# Altium PCB Bop_it.PcbDoc
Units mil, origin at the board's own origin, x right, y up, seen from the top; angles counter-clockwise.
Board outline 6000 x 4000 mil, 4 copper layers (Top Layer, Top Mid Layer, Bottom Mid Layer, Bottom Layer), stack 23.756 mil thick; 32 components, 48 nets, 167 pads, 0 vias.
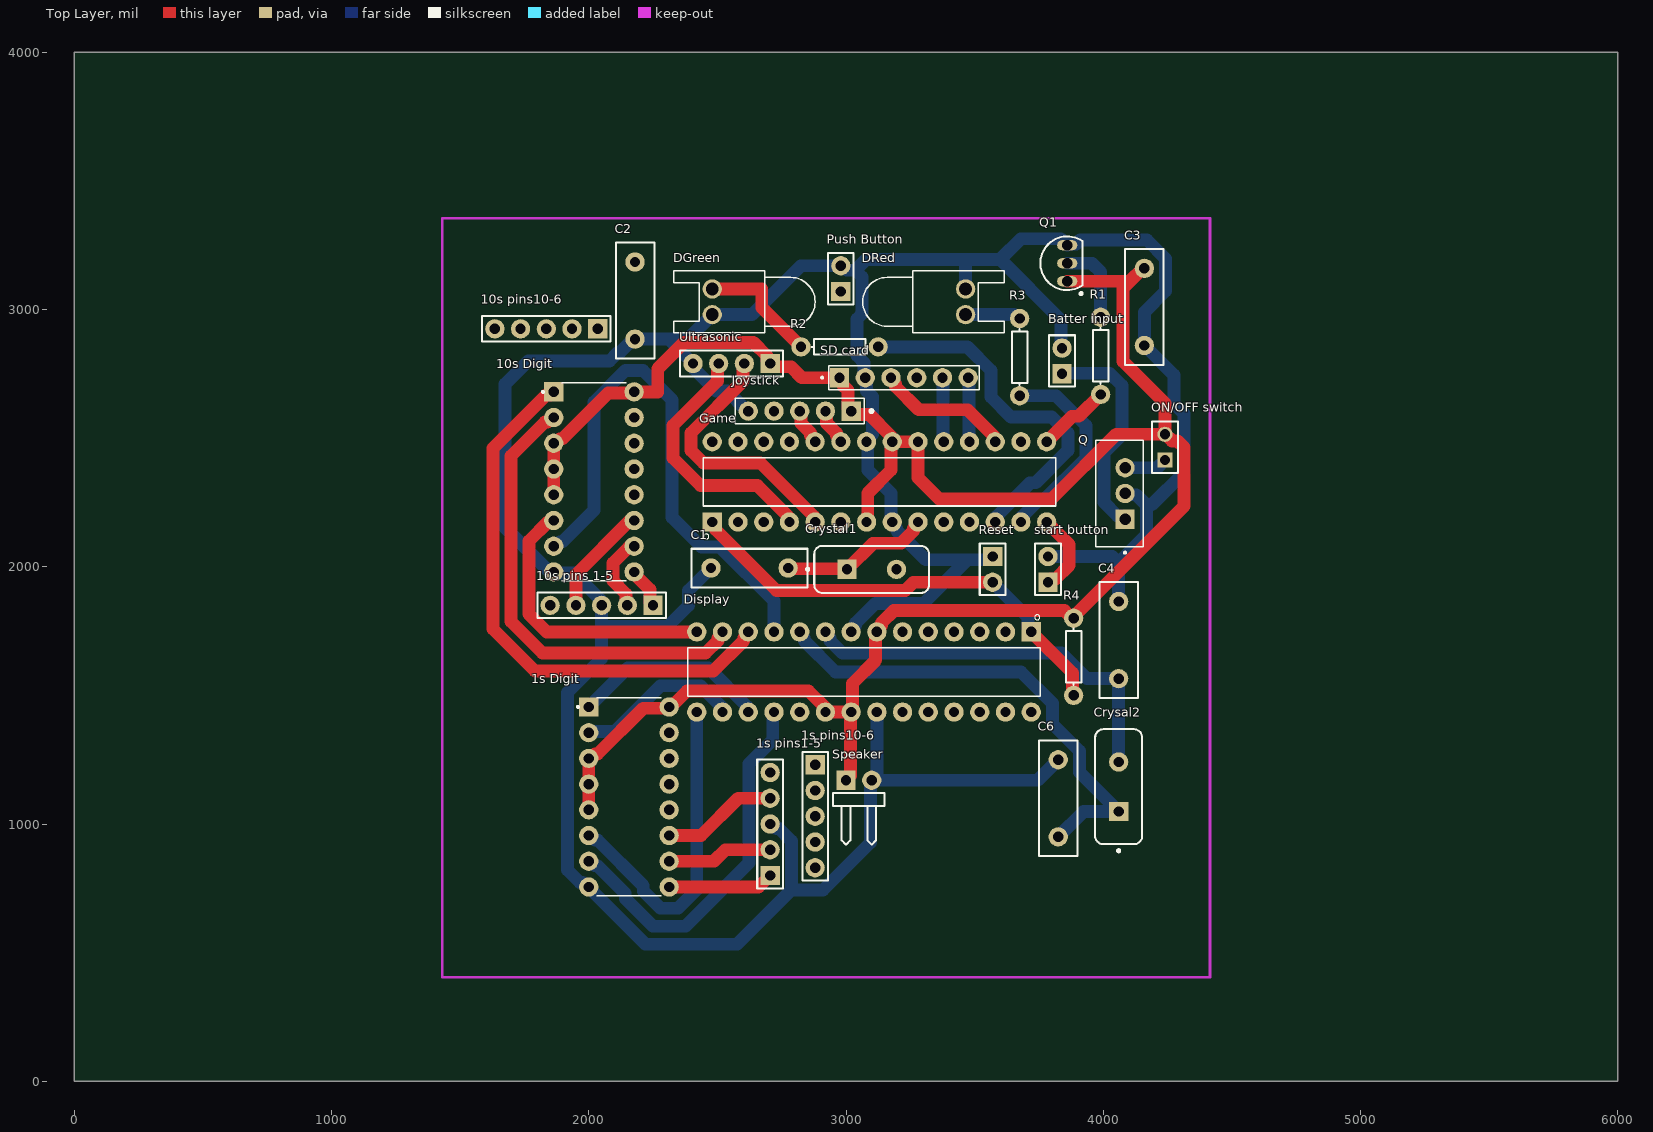
[diagram p0: Top Layer view]
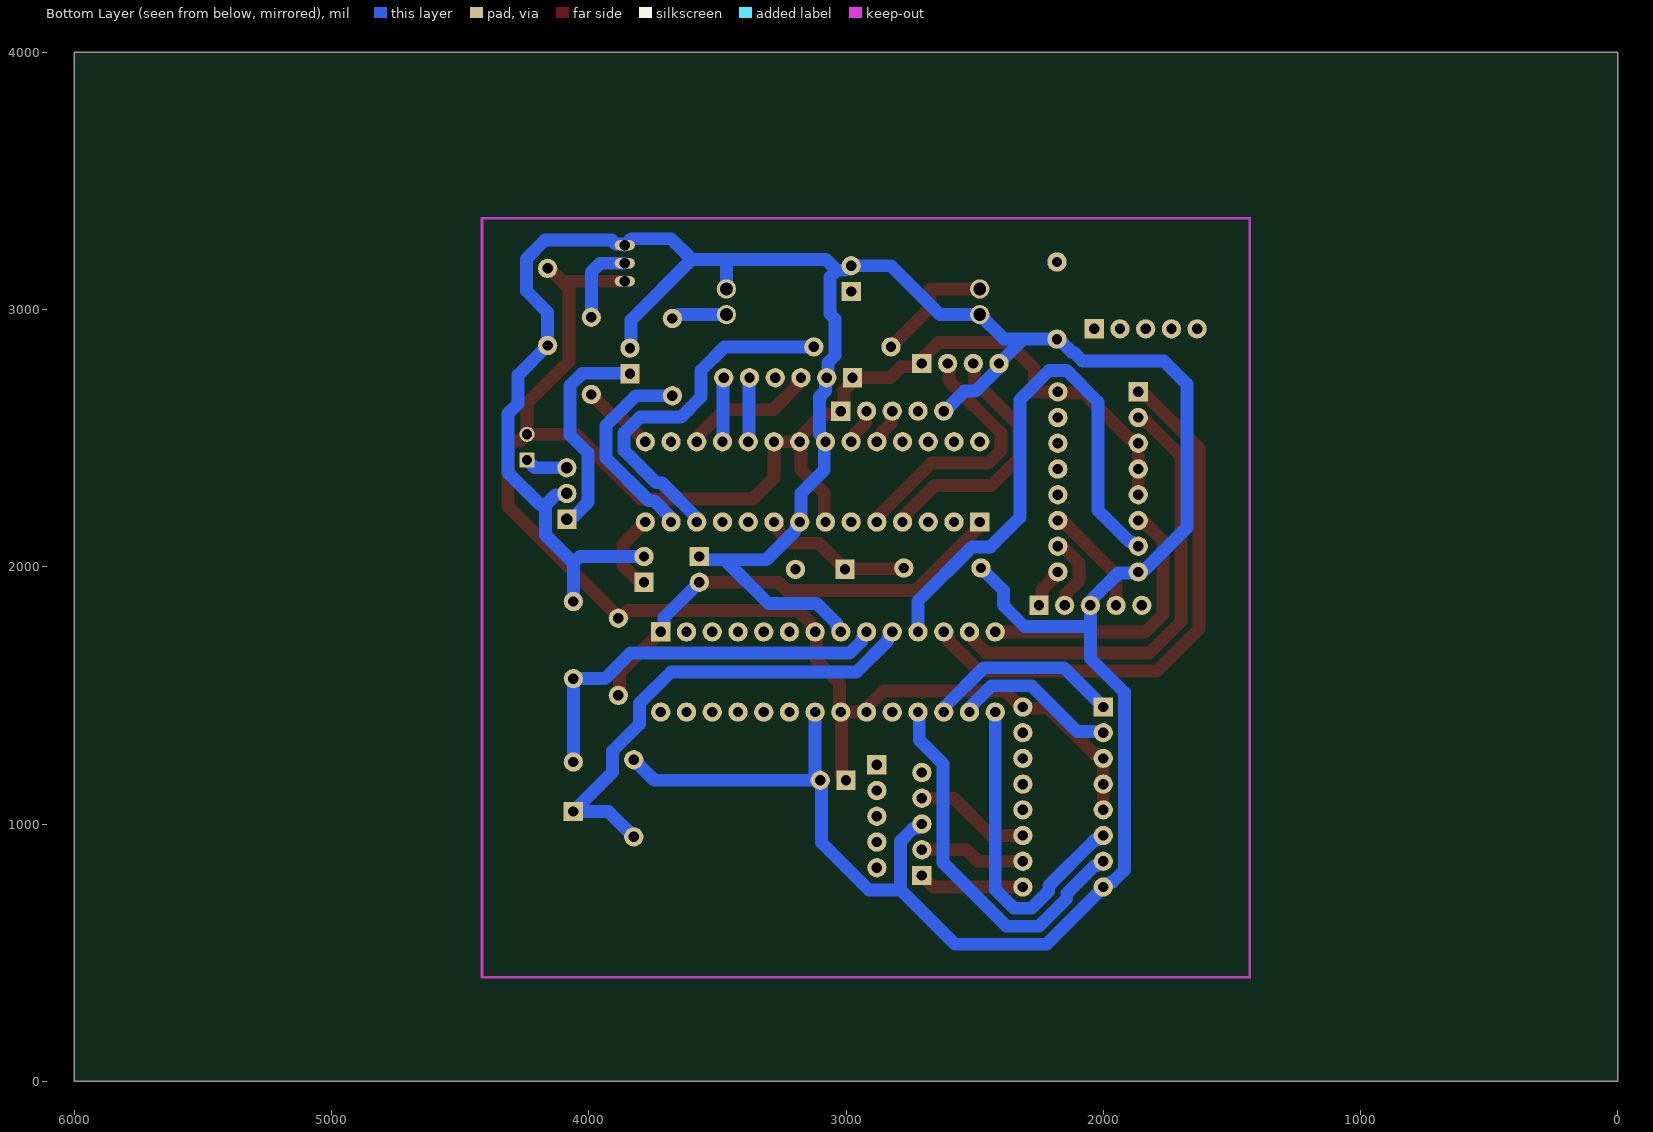
[diagram p1: Bottom Layer view, seen from below]
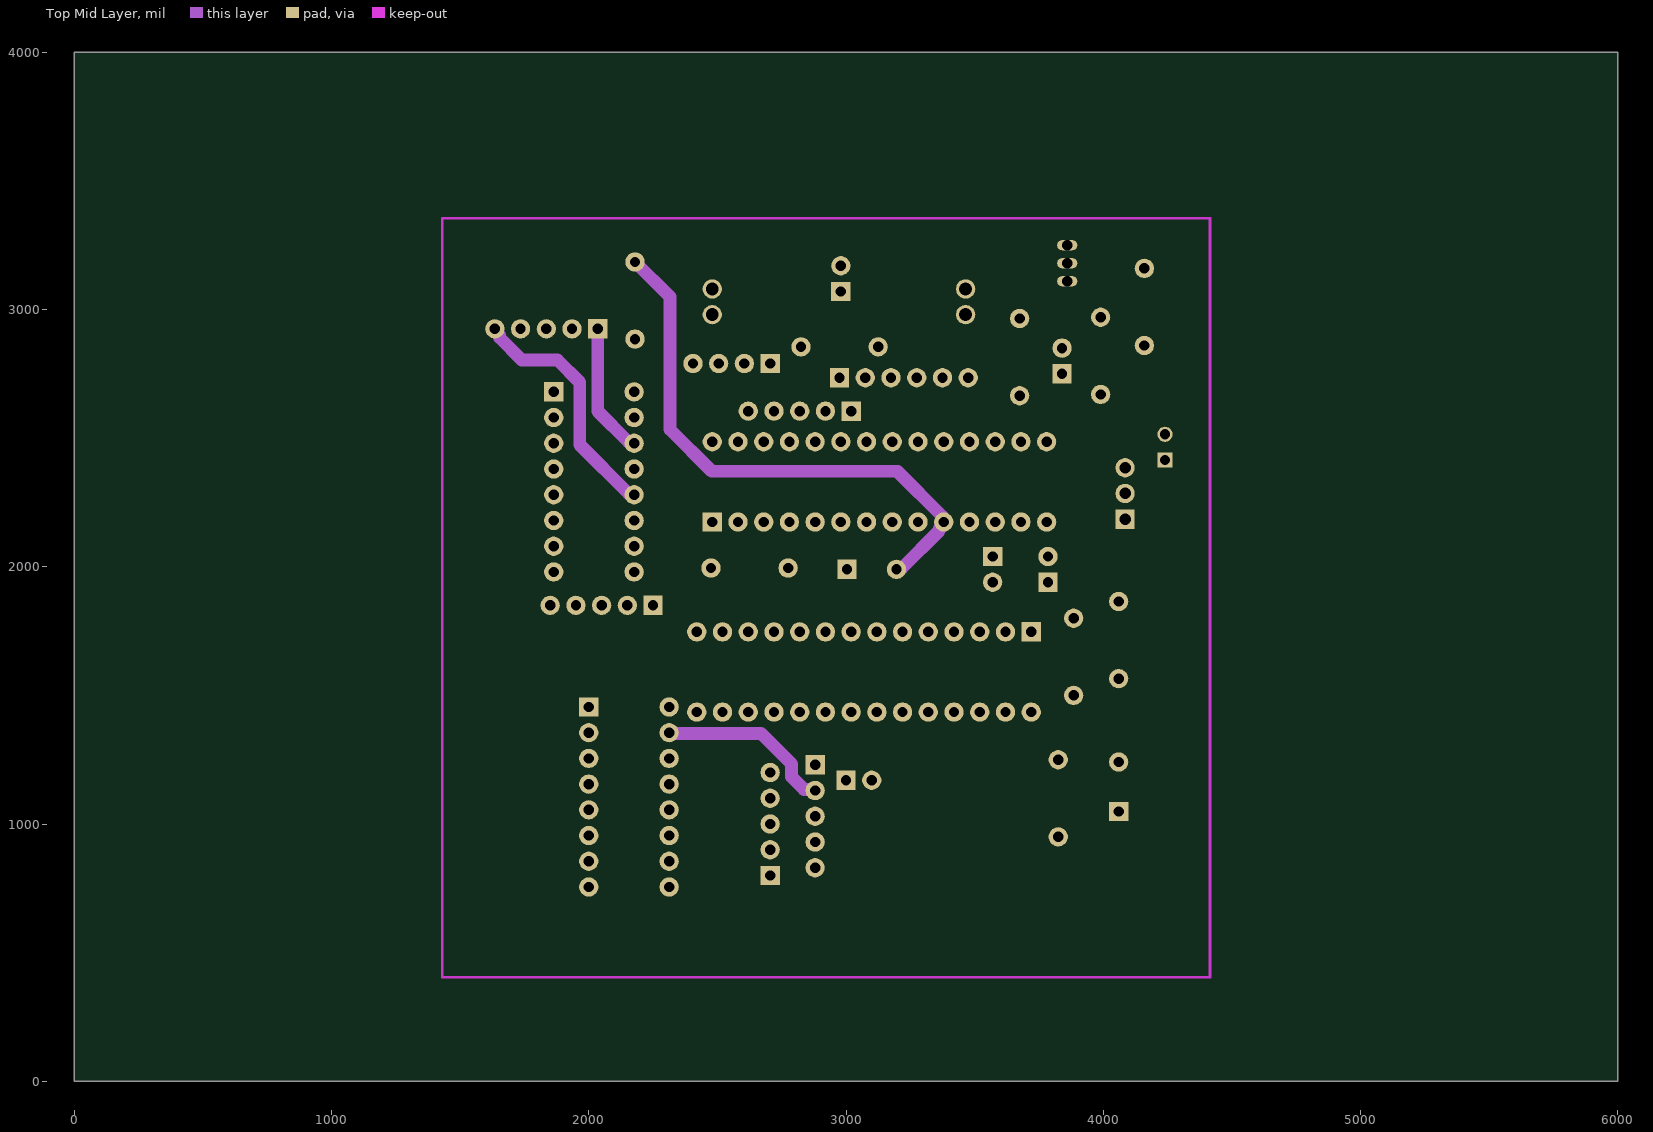
[diagram p2: Top Mid Layer]
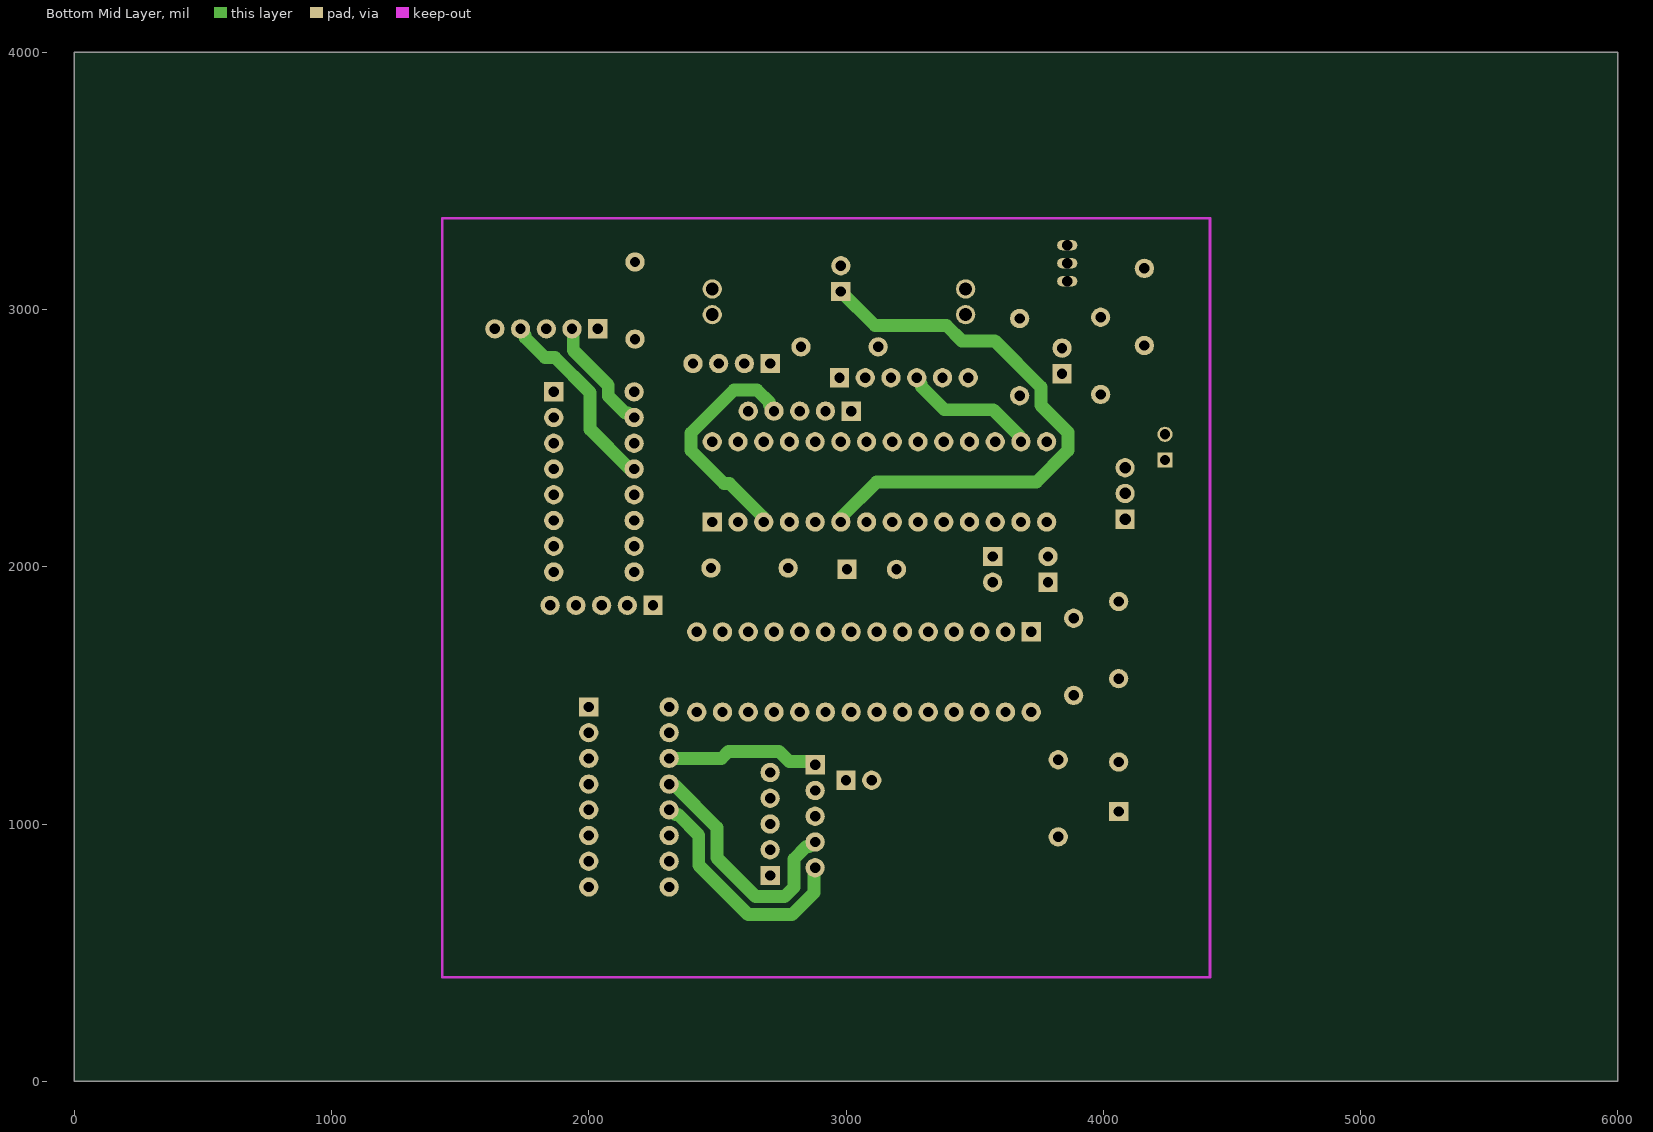
[diagram p3: Bottom Mid Layer]

## Layer stack, top to bottom
Top Solder: solder mask 0.4, Solder Resist, Dk 3.5
Top Layer: signal copper 1.4
Dielectric 2: prepreg 2.8, PP-006, Dk 4.1
Top Mid Layer: signal copper 1.378
Dielectric 1: dielectric 12.6, FR-4, Dk 4.8
Bottom Mid Layer: signal copper 1.378
Dielectric 3: prepreg 2.8, PP-006, Dk 4.1
Bottom Layer: signal copper 1.4
Bottom Solder: solder mask 0.4, Solder Resist, Dk 3.5

## Board outline
0,0 6000,0 6000,4000 0,4000

## Design rules (kind name [scope] priority, off if disabled: settings)
BoardOutlineClearance [All] p1: gap=12 ignorepadtopadclearanceinfootprint=FALSE
Clearance [All] p1: gap=20 ignorepadtopadclearanceinfootprint=TRUE except(24: Arc-Via Track-Via SMDPad-Via THPad-Via Via-Via Via-Fill Via-Poly Via-Region Via-Text Via-Hole)
DiffPairsRouting [All] p1: maxlimit=10 minlimit=7 mostfreqgap=10 toplayer_minwidth=6 toplayer_maxwidth=15 toplayer_prefwidth=8 midlayer1_mingap=10 midlayer1_minwidth=15 midlayer1_maxwidth=15 midlayer1_prefwidth=15 midlayer2_mingap=10 midlayer2_minwidth=15 midlayer2_maxwidth=15 midlayer2_prefwidth=15 bottomlayer_minwidth=6 bottomlayer_maxwidth=15 bottomlayer_prefwidth=8 maxuncoupledlength=500
HoleSize [All] p1: absolutevalues=TRUE maxlimit=1000 minlimit=39.37 maxpercent=80.000 minpercent=20.000
HoleToHoleClearance [All] p1: gap=17 allowstackedmicrovias=TRUE
PolygonConnect [All] p1: connectstyle=Relief reliefconductorwidth=10 reliefentries=4 polygonreliefangle="90 Angle" airgapwidth=10
RoutingVias [All] p1: holewidth=30 width=35 viastyle="Through Hole" minholewidth=10 minwidth=11 maxholewidth=255 maxwidth=250
SilkToSilkClearance [All] p1: silktosilkclearance=0
SolderMaskExpansion SolderMaskExpansion_1 [All] p1: expansion=4 istentingtop=FALSE
Width [All] p1: maxlimit=10000 minlimit=30 preferedwidth=50 minimp=50.000000 maximp=50.000000 favimp=50.000000
26 further rules are at their usual default settings.

## Components (designator, comment, footprint, x,y, rotation, side; value= is the part's Value field where it differs from the comment)
"1s Digit" "SN74LS247N" DIP794W45P254L1969H508Q16 2156.3,1105 r0 top
"1s pins1-5" "Header 5" HDR1X5 2705,800 r90 top
"1s pins10-6" "Header 5" HDR1X5 2880,1230 r270 top
"10s Digit" "SN74LS247N" DIP794W45P254L1969H508Q16 2020,2330 r0 top
"10s pins10-6" "Header 5" HDR1X5 2035,2925 r180 top
"10s pins 1-5" "Header 5" HDR1X5 2250,1850 r180 top
"Batter input" "Header 2" HDR1X2#1 3840,2750 r90 top
C1 "C1" RAD-0.3 2625,1995 r0 top value=22pF
C2 "C2" RAD-0.3 2180,3035 r90 top value=22pF
C3 "Cap" RAD-0.3 4160,3010 r90 top value=10uF
C4 "C1" RAD-0.3 4060,1715 r90 top value=22pF
C6 "C5" RAD-0.3 3825,1100 r90 top value=22pF
Crysal2 "FOXSLF/160-20" FOX-FOXSLF160-20 4060,1145 r90 top
Crystal1 "FOXSLF/160-20" FOX-FOXSLF160-20 3100,1990 r0 top
DGreen "LED0" LED-0 2480,3030 r90 top
Display "ATMEGA328P-PU" DIP794W46P254L2967H457Q28B 3070,1590.91 r270 top
DRed "LED0" LED-0 3465,3030 r270 top
Game "ATMEGA328P-PU" DIP794W46P254L2967H457Q28B 3130,2330 r90 top
Joystick "Joystick" TE_826629-5 3020,2605 r180 top
"ON/OFF switch" "Header 2" HDR1X2#2 4240,2415 r90 top
"Push Button" "Header 2" HDR1X2#1 2980,3070 r90 top
Q "LM7805CT/NOPB" TO254P1054X470X2600-3 4085,2185 r90 top
Q1 "NPN" TO-226-AA 3860,3180 r0 top
R1 "Res1" AXIAL-0.3 3990,2820 r90 top value=n/a
R2 "Res1" AXIAL-0.3 2975,2855 r0 top value=1.2k
R3 "Res1" AXIAL-0.3 3675,2815 r270 top value=1.2k
R4 "Res1" AXIAL-0.3 3885,1650 r90 top value=10K
Reset "Header 2" HDR1X2#1 3570,2040 r270 top
"SD card" "SD Card Reader" TE_5-146285-6 2975,2735 r0 top
Speaker "Header 2H" HDR1X2H 3000,1170 r0 top
"start button" "Header 2" HDR1X2#1 3785,1940 r90 top
Ultrasonic "Ultrasonic sensor" HDR1X4 2705,2790 r180 top

## Footprints (in the part's own frame and the unit in brackets; to place one, negate y for a bottom-side part, rotate by r counter-clockwise, add the part's x,y. Pads: shape width x height; smd on the part's side, far side on the other; paste and mask are expansions set on the pad)
AXIAL-0.3 [mil] "Axial Device, Thru-Hole; 2 Leads; 0.3 in Pin Spacing"
  round 75 hole 40: 1(-150,0) 2(150,0)
  silkscreen extent -109,-30 109,30
DIP794W45P254L1969H508Q16 [mil]
  rect 75x75 hole 40: 1(-156.3,350)
  round 75 hole 40: 2(-156.3,250) 3(-156.3,150) 4(-156.3,50) 5(-156.3,-50) 6(-156.3,-150) 7(-156.3,-250) 8(-156.3,-350) 9(156.3,-350) 10(156.3,-250) 11(156.3,-150) 12(156.3,-50) 13(156.3,50) 14(156.3,150) 15(156.3,250) 16(156.3,350)
  silkscreen extent -202,-385 125,385, body extent -380,-215 380,215, height 200
DIP794W46P254L2967H457Q28B [mil]
  rect 75x75 hole 40: 1(-155.91,650)
  round 75 hole 40: 2(-155.91,550) 3(-155.91,450) 4(-155.91,350) 5(-155.91,250) 6(-155.91,150) 7(-155.91,50) 8(-155.91,-50) 9(-155.91,-150) 10(-155.91,-250) 11(-155.91,-350) 12(-155.91,-450) 13(-155.91,-550) 14(-155.91,-650) 15(155.91,-650) 16(155.91,-550) 17(155.91,-450) 18(155.91,-350) 19(155.91,-250) 20(155.91,-150) 21(155.91,-50) 22(155.91,50) 23(155.91,150) 24(155.91,250) 25(155.91,350) 26(155.91,450) 27(155.91,550) 28(155.91,650)
  silkscreen extent -223,-685 94,685
FOX-FOXSLF160-20 [mil] "THD, 2-Leads, Body 11.35x4.65mm"
  rect 75x75 hole 40: 1(-96.06,0)
  round 75 hole 40: 2(96.06,0)
  silkscreen extent -254,-92 223,92, body extent -223,-92 223,92, height 142
HDR1X2#1 [mil] "Connector; Header; 2 Position"
  rect 75x75 hole 40: 1(0,0)
  round 75 hole 40: 2(100,0)
  silkscreen extent -50,-50 150,50
HDR1X2#2 [mil] "Connector; Header; 2 Position"
  rect 59.06x59.06 hole 40: 1(0,0)
  round 59.06 hole 40: 2(100,0)
  silkscreen extent -50,-50 150,50
HDR1X2H [mil] "Connector; Header; 2 Position; Right Angle"
  rect 75x75 hole 40: 1(0,0)
  round 75 hole 40: 2(100,0)
  silkscreen extent -50,-250 150,-50
HDR1X4 [mil] "Connector; Header; 4 Position"
  rect 75x75 hole 40: 1(0,0)
  round 75 hole 40: 2(100,0) 3(200,0) 4(300,0)
  silkscreen extent -50,-50 350,50
HDR1X5 [mil] "Connector; Header; 5 Position"
  rect 75x75 hole 40: 1(0,0)
  round 75 hole 40: 2(100,0) 3(200,0) 4(300,0) 5(400,0)
  silkscreen extent -50,-50 450,50
LED-0 [mil] "LED; 2 Leads"
  round 75 hole 50: 1(50,0) 2(-50,0)
  silkscreen extent -120,-400 120,150
RAD-0.3 [mil] "Radial Cap, Thru-Hole; 2 Leads; 0.3 in Pin Spacing"
  round 75 hole 40: 1(-150,0) 2(150,0)
  silkscreen extent -225,-75 225,75
TE_5-146285-6 [mil]
  rect 75x75 hole 40: 1(0,0)
  round 75 hole 40: 2(100,0) 3(200,0) 4(300,0) 5(400,0) 6(500,0)
  silkscreen extent -72,-46 542,46
TE_826629-5 [mil]
  rect 75x75 hole 40: 1(0,0)
  round 75 hole 40: 2(100,0) 3(200,0) 4(300,0) 5(400,0)
  silkscreen extent -85,-49 450,49
TO254P1054X470X2600-3 [mil]
  rect 75x75 hole 45: 1(0,0)
  round 75 hole 45: 2(100,0) 3(200,0)
  silkscreen extent -134,-71 307,114
TO-226-AA [mm] "TO, Flat Index; 3 In-Line, Axial Leads; Body Dia. 4.8mm; Leads 0.55 x 0.51 mm (max)"
  oval 2x1 hole 1.016: 1(0,-1.778) 2(0,0) 3(0,1.778)
  silkscreen extent -2.65,-3.13 1.52,2.65, body extent -2.65,-2.66 1.52,2.66, height 5.33

## Part data
"1s Digit" "10s Digit": "BCD-To-Seven-Segment Decoders/Drivers 16-PDIP 0 to 70", Package="PDIP-16 Texas Instruments", Check_prices=https://www.snapeda.com/parts/SN74LS247N/Texas%20Instruments/view-part/230215/?ref=eda, Digi-Key_Part_Number=296-28943-2-ND, MF="Texas Instruments", MP=SN74LS247N, Purchase-URL=https://pricing.snapeda.com/search/part/SN74LS247N/?ref=eda, SnapEDA_Link=https://www.snapeda.com/parts/SN74LS247N/Texas%20Instruments/view-part/230215/?ref=snap
"1s pins1-5" "1s pins10-6" "10s pins10-6" "10s pins 1-5": "Header, 5-Pin", LatestRevisionDate=17-Jul-2002, LatestRevisionNote="Re-released for DXP Platform.", Publisher="Altium Limited"
"Batter input" "ON/OFF switch" "Push Button" Reset "start button": "Header, 2-Pin", LatestRevisionDate=17-Jul-2002, LatestRevisionNote="Re-released for DXP Platform.", Publisher="Altium Limited"
C1 C2 C4 C6: library part Cap, "Capacitor", LatestRevisionDate=17-Jul-2002, LatestRevisionNote="Re-released for DXP Platform.", PackageDescription="Radial Cap, Thru-Hole; 2 Leads; 0.3 in Pin Spacing", PackageReference=RAD-0.3, Published=8-Jun-2000, Publisher="Altium Limited"
C3: "Capacitor", LatestRevisionDate=17-Jul-2002, LatestRevisionNote="Re-released for DXP Platform.", PackageDescription="Radial Cap, Thru-Hole; 2 Leads; 0.3 in Pin Spacing", PackageReference=RAD-0.3, Published=8-Jun-2000, Publisher="Altium Limited"
Crysal2 Crystal1: library part CMP-1749-00003-1, "Resistance Weld Thru-Hole Crystal, 16 MHz, -20 to 70 degC, 2-Pin THD, RoHS, Bulk", Case\Package=Axial, Max Operating Temperature="155 degC", Min Operating Temperature="-55 degC", Package Quantity=200, Power Rating="250 mW", Resistance="221 kohm", Tolerance=1%, Voltage Rating="250 V", ComponentLink1Description="Manufacturer URL", ComponentLink1URL=http://www.foxonline.com/, ComponentLink2Description=Datasheet, ComponentLink2URL=http://www.foxonline.com/pdfs/hc49slf.pdf, DatasheetVersion=Mar-15, Length="0.248 inch", Mount="Through Hole", PackageDescription="2-Pin Through Hole Device, Body 11.35 x 4.65 mm", PackageReference=FOXSLF160-20, Packaging=Bulk, RoHSCompliant=true
DGreen DRed: "Typical INFRARED GaAs LED", LatestRevisionDate=08-Jul-2005, LatestRevisionNote="Mech Layer 1 removed.", PackageDescription="LED; 2 Leads", PackageReference=LED-0, Published=8-Jun-2000, Publisher="Altium Limited"
Display Game: "AVR AVRÂ® ATmega Microcontroller IC 8-Bit 20MHz 32KB _16K x 16_ FLASH 28-PDIP", Package="PDIP-28 Atmel", Availability=Unavailable, MF=Microchip, MP=ATMEGA328P-PU, Price=None, SnapEDA_Link=https://www.snapeda.com/parts/ATMEGA328P-PU/Microchip/view-part/44282/?ref=snap
Joystick: library part 826629-5, "Board-To-Board Connector, AMPMODU MOD II Series, Through Hole, Header, 5, 2.54 mm", Package=None, Availability=Unavailable, Centerline_Pitch="2.54 mm[.1 in]", EU_RoHS_Compliance=Compliant, MF="TE Connectivity", MP=826629-5, Number_of_Positions=5, Price=None, Product_Type=Connector, SnapEDA_Link=https://www.snapeda.com/parts/826629-5/TE%20Connectivity%20AMP%20Connectors/view-part/905319/?ref=snap, TE_purchase_URL=https://www.te.com/usa-en/product-826629-5.html?te_bu=Cor&te_type=disp&te_campaign=seda_glo_cor-seda-global-disp-prtnr-fy19-seda-model-bom-cta_sma-317_1&elqCampaignId=32493
Q: "Linear Voltage Regulator IC 1 Output 1A TO-220-3", Package="TO-220 ON Semiconductor", Availability=Unavailable, MF="ON Semiconductor", MP=LM7805CT, Price=None, SnapEDA_Link=https://www.snapeda.com/parts/LM7805CT/ON%20Semiconductor/view-part/546231/?ref=snap
Q1: "NPN Bipolar Transistor", Code_JEDEC=TO-226-AA, LatestRevisionDate=17-Jul-2002, LatestRevisionNote="Re-released for DXP Platform.", PackageDescription="TO, Flat Index; 3 In-Line, Axial Leads; Body Dia. 4.8mm; Leads 0.55 x 0.51 mm (max)", PackageReference=TO-226-AA, Published=8-Jun-2000, Publisher="Altium Limited"
R1 R2 R3 R4: "Resistor", LatestRevisionDate=17-Jul-2002, LatestRevisionNote="Re-released for DXP Platform.", PackageDescription="Axial Device, Thru-Hole; 2 Leads; 0.3 in Pin Spacing", PackageReference=AXIAL-0.3, Published=8-Jun-2000, Publisher="Altium Limited"
"SD card": library part 5-146285-6, "Connector Header Through Hole 6 position 0.100 (2.54mm)", Package=None, Digi-Key_Part_Number=A122872-ND, DigiKey-Purchase-URL=https://snapeda.com/shop?store=DigiKey&id=2411669, EU_RoHS_Compliance=Compliant, MF="TE Connectivity", MP=5-146285-6, SnapEDA_Link=https://www.snapeda.com/parts/5-146285-6/TE%20Connectivity%20AMP%20Connectors/view-part/2411669/?ref=snap
Speaker: "Header, 2-Pin, Right Angle", LatestRevisionDate=17-Jul-2002, LatestRevisionNote="Re-released for DXP Platform.", Publisher="Altium Limited"
Ultrasonic: library part "Header 4", "Header, 4-Pin", LatestRevisionDate=17-Jul-2002, LatestRevisionNote="Re-released for DXP Platform.", Publisher="Altium Limited"

## Nets (pads, with @x,y where several pads share a name; then routed paths per layer and width w, separated by ;. In a path a pad name is that pad's centre, name@x,y a point inside that pad or via, vN(x,y) a via of type N, cw(c..) or ccw(c..) an arc to the next point about the centre after c; other vN are vias at no path point)
Bit0: "10s Digit.7" Display.11 | length 2144.4
  Bottom Layer w50: 1863.7,2080 1870.47,2080 1887.97,2097.5 1897.87,2097.5 2020,2219.63 2020,2640.37 2142.13,2762.5 2210.47,2762.5 2324.21,2648.76 2324.21,2191.24 2437.95,2077.5 2509.17,2077.5 2720,1866.67 Display.11
Bit1: "10s Digit.1" Display.12 | length 2162.9
  Top Layer w50: 1863.7,2680 1851.2,2667.5 1834.53,2667.5 1627.5,2460.47 1627.5,1757.84 1791.03,1594.31 2484.17,1594.31 2602.5,1712.64 2602.5,1722.55 2620,1740.05 Display.12
Bit2: "10s Digit.2" Display.13 | length 1789
  Top Layer w50: 1863.7,2580 1856.94,2580 1839.44,2562.5 1829.53,2562.5 1697.5,2430.47 1697.5,1786.83 1820.02,1664.31 2454.17,1664.31 2502.5,1712.64 2502.5,1722.55 2520,1740.05 Display.13
bit3: "10s Digit.6" Display.14 | length 1094.9
  Top Layer w50: 1863.7,2180 1858.92,2175.22 1842.24,2175.22 1767.5,2100.47 1767.5,1815.83 1836.52,1746.81 Display.14
CorrectSignal: Game.12 R2.2 | length 1412.4
  Bottom Layer w50: R2.2 3471.67,2855 3563.64,2763.03 3563.64,2659.69 3640.83,2582.5 3800.08,2582.5 3862.5,2520.08 3862.5,2451.73 3737.36,2326.59 3715.83,2326.59 3584.78,2195.55 3584.78,2178.88 Game.12
gnd: "1s Digit.8" "1s pins1-5.3" "10s Digit.8" "10s pins 1-5.3" "Batter input.2" "Push Button.2" "SD card.2" "start button.2" C1.1 C2.1 C3.1 C4.2 C6.2 DGreen.2 Display.8 Display.22 DRed.2 Game.8 Game.22 Joystick.5 Q1.3 Q.2 Reset.1 Speaker.2 Ultrasonic.4 | length 13627.7
  Bottom Layer w50: C1.1 2388.18,1908.18 2388.18,1849.54 2306.14,1767.5 2062.5,1767.5 2050,1780 ; Joystick.5 2616.51,2605 2538.71,2682.81 2495.52,2682.81 2409.78,2768.54 2409.78,2785.22 Ultrasonic.4 2309.78,2885.22 ; 2705,1000 2711.76,1000 2729.26,982.5 2739.17,982.5 2787.5,934.17 2787.5,743.86 ; Display.8 3020,1753.58 3037.5,1771.08 3037.5,1780.98 3114.02,1857.5 3301.14,1857.5 3471.14,2027.5 ; Speaker.2@3120,1196.76 Display.22 ; DRed.2 3465,3195 ; Reset.1 3557.5,2027.5 3471.14,2027.5 ; 3785,2040 4035.2,2040 4060,2015.2 ; C6.2 3745,1170 Speaker.2 3095.22,1165.22 3095.22,928.54 2910.53,743.86 2787.5,743.86 ; 3840,2850 3835.22,2854.78 3835.22,2959.78 3600,3195 ; C4.2 4060,2015.2 ; Q.2 4089.78,2280.22 4128.42,2280.22 4167.5,2241.14 ; 2050,1780 2050,1850 2045.22,1854.78 2045.22,1871.46 1941.46,1975.22 1868.48,1975.22 1863.7,1980 1858.92,1984.78 1842.24,1984.78 1675,2152.03 1675,2710 1765,2800 2080.55,2800 2113.05,2832.5 2120.73,2832.5 2178.24,2890 2185,2890 2189.78,2885.22 2309.78,2885.22 ; 2050,1780 2050,1643.64 1917.5,1511.14 1917.5,820.83 1965.83,772.5 1975.74,772.5 1993.24,755 2000,755 2000,752.94 2220.44,532.5 2576.14,532.5 2787.5,743.86 ; 2309.78,2885.22 2385.22,2885.22 DGreen.2 2635,2980 2825,3170 2980,3170 2986.76,3170 3004.26,3152.5 3036.14,3152.5 ; 3036.14,3152.5 3062.5,3126.14 3062.5,2983.48 3042.5,2963.48 3042.5,2820.83 3070.22,2793.11 3070.22,2739.78 3075,2735 3079.78,2730.22 3079.78,2683.86 3102.5,2661.14 3102.5,2515.17 3080,2492.67 Game.22 3084.78,2481.12 3084.78,2376.08 3175.22,2285.64 3175.22,2178.88 Game.8 3180,2167.33 3197.5,2149.83 3197.5,2139.92 3309.92,2027.5 3471.14,2027.5 ; 3036.14,3152.5 3078.64,3195 3465,3195 ; 3465,3195 3600,3195 ; 3600,3195 3680,3275 3835,3275 Q1.3 3865.31,3255.31 3895.31,3255.31 3910,3270 4170,3270 4242.5,3197.5 4242.5,3071.72 4160,2989.22 C3.1 4274.53,2745.47 4274.53,2634.8 4314.53,2594.8 4314.53,2366.83 4188.83,2241.14 4167.5,2241.14 ; 4060,2015.2 4167.5,2122.7 4167.5,2241.14
IncorrectSignal: Game.13 R3.2 | length 803.9
  Bottom Layer w50: R3.2@3679.78,2660.22 R3.2 3816.57,2665 3932.5,2549.07 3932.5,2422.74 3766.36,2256.59 3745.83,2256.59 3684.78,2195.55 3684.78,2178.88 Game.13
MISO: "SD card.6" Game.18 | length 251.2
  Bottom Layer w50: 3475,2735 3477.5,2732.5 3477.5,2488.41 Game.18
MOSI: "SD card.3" Game.17 | length 527.7
  Top Layer w50: 3175,2735 3175,2728.24 3192.5,2710.74 3192.5,2700.83 3282.87,2610.45 3472.13,2610.45 3575.22,2507.36 3575.22,2490.69 Game.17
"Net1s Digit_1": "1s Digit.1" Display.17 | length 764.4
  Bottom Layer w50: 2000,1455 2152.5,1607.5 2464.17,1607.5 2615.22,1456.46 2615.22,1439.78 Display.17
"Net1s Digit_2": "1s Digit.2" Display.16 | length 647.8
  Bottom Layer w50: 2000,1355 2004.78,1359.78 2100.71,1359.78 2278.43,1537.5 2434.17,1537.5 2515.22,1456.46 2515.22,1439.78 Display.16
"Net1s Digit_6": "1s Digit.6" Display.15 | length 1268.8
  Bottom Layer w50: 2000,955 2006.76,955 2024.26,937.5 2034.17,937.5 2211.8,759.87 2211.8,739.12 2278.43,672.5 2346.77,672.5 2420,745.73 Display.15
"Net1s Digit_7": "1s Digit.7" Display.18 | length 1467
  Bottom Layer w50: 2000,855 2006.76,855 2024.26,837.5 2034.17,837.5 2141.8,729.87 2141.8,710.13 2249.43,602.5 2375.77,602.5 2622.5,849.23 2622.5,1234.17 2715.22,1326.89 2715.22,1430.22 Display.18
"Net1s Digit_9": "1s Digit.9" "1s pins1-5.1" | length 411
  Top Layer w50: 2312.6,755 2660,755 2705,800
"Net1s Digit_10": "1s Digit.10" "1s pins1-5.2" | length 411
  Top Layer w50: 2312.6,855 2486.3,855 2531.3,900 2705,900
"Net1s Digit_11": "1s Digit.11" "1s pins1-5.4" | length 452.5
  Top Layer w50: 2312.6,955 2436.3,955 2581.3,1100 2705,1100
"Net1s Digit_12": "1s Digit.12" "1s pins10-6.5" | length 934.5
  Bottom Mid Layer w50: 2312.6,1055 2319.36,1055 2336.86,1037.5 2346.77,1037.5 2427.82,956.46 2427.82,839.55 2619.87,647.5 2790.13,647.5 2875.22,732.58 2875.22,825.22 2880,830
"Net1s Digit_13": "1s Digit.13" "1s pins10-6.4" | length 970.3
  Bottom Mid Layer w50: 2312.6,1155 2317.38,1150.22 2334.05,1150.22 2497.82,986.46 2497.82,868.54 2648.86,717.5 2761.14,717.5 2797.5,753.86 2797.5,864.17 2845.83,912.5 2855.74,912.5 2873.24,930 2880,930
"Net1s Digit_14": "1s Digit.14" "1s pins10-6.1" | length 600.5
  Bottom Mid Layer w50: 2312.6,1255 2515.52,1255 2543.02,1282.5 2739.17,1282.5 2779.17,1242.5 2867.5,1242.5 2880,1230
"Net1s Digit_15": "1s Digit.15" "1s pins10-6.2" | length 690.1
  Top Mid Layer w50: 2312.6,1355 2315.1,1352.5 2669.17,1352.5 2787.87,1233.8 2787.87,1183.49 2836.58,1134.78 2875.22,1134.78 2880,1130
"Net10s Digit_9": "10s Digit.9" "10s pins 1-5.1" | length 160.5
  Top Layer w50: 2176.3,1980 2176.3,1973.24 2237.5,1912.03 2237.5,1862.5 2250,1850
"Net10s Digit_10": "10s Digit.10" "10s pins 1-5.2" | length 297.2
  Top Layer w50: 2150,1850 2145.22,1854.78 2145.22,1894.41 2093.8,1945.83 2093.8,2014.17 2154.84,2075.22 2171.52,2075.22 2176.3,2080
"Net10s Digit_11": "10s Digit.11" "10s pins 1-5.4" | length 433.5
  Top Layer w50: 1950,1850 1950,1970.37 2154.84,2175.22 2171.52,2175.22 2176.3,2180
"Net10s Digit_12": "10s Digit.12" "10s pins10-6.5" | length 960.4
  Top Mid Layer w50: 1635,2925 1635,2918.24 1652.5,2900.74 1652.5,2890.83 1739.24,2804.08 1878.26,2804.08 1965,2717.34 1965,2474.63 2154.84,2284.78 2171.52,2284.78 2176.3,2280
"Net10s Digit_13": "10s Digit.13" "10s pins10-6.4" | length 760.4
  Bottom Mid Layer w50: 1735,2925 1735,2918.24 1752.5,2900.74 1752.5,2890.83 1829.84,2813.48 1868.86,2813.48 2005.49,2676.85 2005.49,2534.13 2154.84,2384.78 2171.52,2384.78 2176.3,2380
"Net10s Digit_14": "10s Digit.14" "10s pins10-6.1" | length 513.3
  Top Mid Layer w50: 2035,2925 2035,2604.63 2154.84,2484.78 2171.52,2484.78 2176.3,2480
"Net10s Digit_15": "10s Digit.15" "10s pins10-6.2" | length 454.7
  Bottom Mid Layer w50: 1935,2925 1939.78,2920.22 1939.78,2841.55 2075.49,2705.84 2075.49,2664.13 2142.13,2597.5 2152.03,2597.5 2169.53,2580 2176.3,2580
"NetBatter input_1": "Batter input.1" Q.1 | length 845.7
  Bottom Layer w50: 3840,2750 3842.5,2752.5 4024.17,2752.5 4072.5,2704.17 4072.5,2512.5 4002.5,2442.5 4002.5,2250.83 4055.83,2197.5 4072.5,2197.5 Q.1
NetC1_2: C1.2 Crystal1.1 Game.9 | length 593.1
  Top Layer w50: C1.2 2777.5,1992.5 3001.44,1992.5 Crystal1.1 3105.53,2091.59 3214.17,2091.59 3262.5,2139.92 3262.5,2149.83 3280,2167.33 Game.9
NetC2_2: C2.2 Crystal1.2 Game.10 | length 2216.9
  Top Layer w50: C2.2@2178.03,3183.03 C2.2 ; Crystal1.2 Crystal1.2@3202.83,1990 ; Game.10@3375.22,2169.31 Game.10
  Top Mid Layer w50: C2.2 2315.31,3049.69 2315.31,2533.93 2478.14,2371.1 3199.67,2371.1 3375.22,2195.55 3375.22,2178.88 Game.10 3380,2167.33 3362.5,2149.83 3362.5,2139.92 3217.36,1994.78 3200.85,1994.78 Crystal1.2
NetC4_1: C4.1 Crysal2.2 Display.9 | length 1549
  Bottom Layer w50: Display.9 2920,1740.05 2937.5,1722.55 2937.5,1712.64 2985.83,1664.31 3837.36,1664.31 3936.67,1565 C4.1 Crysal2.2
NetC6_1: C6.1 Crysal2.1 Display.10 | length 1910.1
  Bottom Layer w50: Display.10 2820,1740.05 2837.5,1722.55 2837.5,1712.64 2959.23,1590.91 3680.77,1590.91 3802.5,1469.17 3802.5,1389.17 3907.5,1284.17 3907.5,1201.44 Crysal2.1 3923.94,1048.94 C6.1
NetDGreen_1: DGreen.1 R2.1 | length 480.7
  Top Layer w50: DGreen.1 2672.5,3080 2672.5,3007.5 R2.1
NetDRed_1: DRed.1 R3.1 | length 216.2
  Bottom Layer w50: DRed.1 3653.24,2980 3668.24,2965 R3.1
NetGame_4: Game.4 Ultrasonic.3 | length 1006
  Top Layer w50: Ultrasonic.3 2500.22,2785.22 2500.22,2721.79 2327.5,2549.07 2327.5,2422.74 2434.74,2315.5 2655.26,2315.5 2775.22,2195.55 2775.22,2178.88 Game.4
NetGame_5: Game.5 Ultrasonic.2 | length 1031.5
  Top Layer w50: Ultrasonic.2 2600.22,2785.22 2600.22,2722.79 2397.5,2520.08 2397.5,2451.73 2445.83,2403.41 2667.36,2403.41 2875.22,2195.55 2875.22,2178.88 Game.5
NetGame_6: "Push Button.1" Game.6 | length 2234.7
  Bottom Mid Layer w50: Game.6 2984.78,2178.88 2984.78,2195.55 3119.23,2330 3740.77,2330 3862.5,2451.73 3862.5,2522.95 3757.5,2627.95 3757.5,2699.17 3578.34,2878.34 3449.99,2878.34 3390.83,2937.5 3112.5,2937.5 2980,3070
  Bottom Layer w50: Game.6 2984.09,2174.09 Game.6@2985,2175
NetGame_14: "start button.1" Game.14 | length 318.4
  Top Layer w50: Game.14@3780,2170 Game.14 3867.5,2086.59 3867.5,2005.83 3814.17,1952.5 3797.5,1952.5 3785,1940
NetGame_15: Game.15 R1.1 | length 286.3
  Top Layer w50: Game.15 3879.09,2585 3905,2585 R1.1
"NetON/OFF switch_1": "ON/OFF switch.1" Q.3 | length 167.4
  Bottom Layer w50: Q.3 4210,2385 4240,2415
NetQ1_2: Q1.2 R1.2 | length 319.9
  Bottom Layer w50: Q1.2 3955.71,3180 3990,3145.71 R1.2
Reset: Display.1 Game.1 R4.1 Reset.2 | length 1800.9
  Top Layer w50: Game.1 2492.5,2161.59 2492.5,2144.92 2729.92,1907.5 3230.24,1907.5 3262.74,1940 Reset.2 Reset.2@3565.22,1944.78 ; Display.1 3880.22,1586.59 3880.22,1504.78 R4.1
  Bottom Layer w50: Reset.2 3707.5,1802.5 3707.5,1759.31 Display.1
SCK: "SD card.5" Game.19 | length 251.2
  Bottom Layer w50: 3375,2735 3377.5,2732.5 3377.5,2488.41 Game.19
SEL: Game.3 Joystick.4 | length 911.4
  Bottom Mid Layer w50: Game.3 2675.22,2178.88 2675.22,2195.55 2547.13,2323.64 2525.59,2323.64 2397.5,2451.73 2397.5,2520.08 2564.92,2687.5 2654.17,2687.5 2702.5,2639.17 2702.5,2629.26 2720,2611.76 Joystick.4
SS: "SD card.4" Game.16 | length 541.2
  Top Layer w50: 3275,2735 3275,2741.76 ; Game.16@3675.22,2490.69 Game.16
  Bottom Mid Layer w50: 3275,2735 3275,2728.24 3292.5,2710.74 3292.5,2700.83 3382.87,2610.45 3572.13,2610.45 3675.22,2507.36 3675.22,2490.69 Game.16
Vcc: "1s Digit.3" "1s Digit.4" "1s Digit.5" "1s Digit.16" "10s Digit.3" "10s Digit.4" "10s Digit.5" "10s Digit.16" "ON/OFF switch.2" "SD card.1" C3.2 Display.7 Display.20 Display.21 Game.7 Game.20 Game.21 Joystick.1 Q1.1 R4.2 Speaker.1 Ultrasonic.1 | length 8403.4
  Top Layer w50: 1863.7,2280 1863.7,2380 1863.7,2480 1870.47,2480 1887.97,2497.5 1897.87,2497.5 2075.59,2675.22 2171.52,2675.22 2176.3,2680 2268.33,2680 2268.33,2770 2370.83,2872.5 2639.17,2872.5 2692.5,2819.17 2692.5,2802.5 Ultrasonic.1 2717.5,2777.5 2785.83,2777.5 2828.33,2735 2975,2735 2987.5,2722.5 2987.5,2705.83 3007.5,2685.83 3007.5,2617.5 Joystick.1 3032.5,2592.5 3090.08,2592.5 3175.22,2507.36 3175.22,2490.69 Game.21 ; 2000,1055 2000,1155 2000,1255 2006.76,1255 2024.26,1272.5 2034.17,1272.5 2211.89,1450.22 2307.81,1450.22 2312.6,1455 2319.36,1455 2381.86,1517.5 2854.17,1517.5 2915.22,1456.46 2915.22,1439.78 Display.20 Display.21 ; Speaker.1 3017.5,1187.5 3017.5,1432.5 Display.21 ; Game.7 3084.78,2178.88 3084.78,2285.64 3175.22,2376.08 3175.22,2481.12 Game.21 ; Q1.1 4103.24,3110 ; C3.2 4153.24,3160 4103.24,3110 ; Display.21 3024.78,1439.78 3024.78,1546.55 3115.22,1636.98 3115.22,1742.03 Display.7 3120,1753.58 3137.5,1771.08 3137.5,1780.98 3185.83,1829.31 3848.92,1829.31 3878.24,1800 R4.2 3885,1806.67 4314.53,2236.2 4314.53,2463.17 4288.17,2489.53 4267.92,2489.53 4242.45,2515 4240,2515 ; Game.21 Game.20 3280,2346.21 3362.71,2263.5 3799.17,2263.5 4050.67,2515 4240,2515 ; 4103.24,3110 4077.5,3084.26 4077.5,2798.17 4240,2635.67 4240,2515
XOUT: Game.23 Joystick.2 | length 143.9
  Top Layer w50: Joystick.2 2924.78,2600.22 2924.78,2557.79 2962.5,2520.08 2962.5,2510.17 2980,2492.67 Game.23
YOUT: Game.24 Joystick.3 | length 143.9
  Top Layer w50: Joystick.3 2824.78,2600.22 2824.78,2557.79 2862.5,2520.08 2862.5,2510.17 2880,2492.67 Game.24
pads on no net: "1s pins1-5.5" "1s pins10-6.3" "10s pins10-6.3" "10s pins 1-5.5" Display.2 Display.3 Display.4 Display.5 Display.6 Display.19 Display.23 Display.24 Display.25 Display.26 Display.27 Display.28 Game.2 Game.11 Game.25 Game.26 Game.27 Game.28

## Keep-outs
Keep-Out Layer:
  lines w10: 1430,405 1430,3355 4415,3355 4415,3315 4415,405 1430,405